# EAGLE board SSU-rev5 (EAGLE 7.2.0)
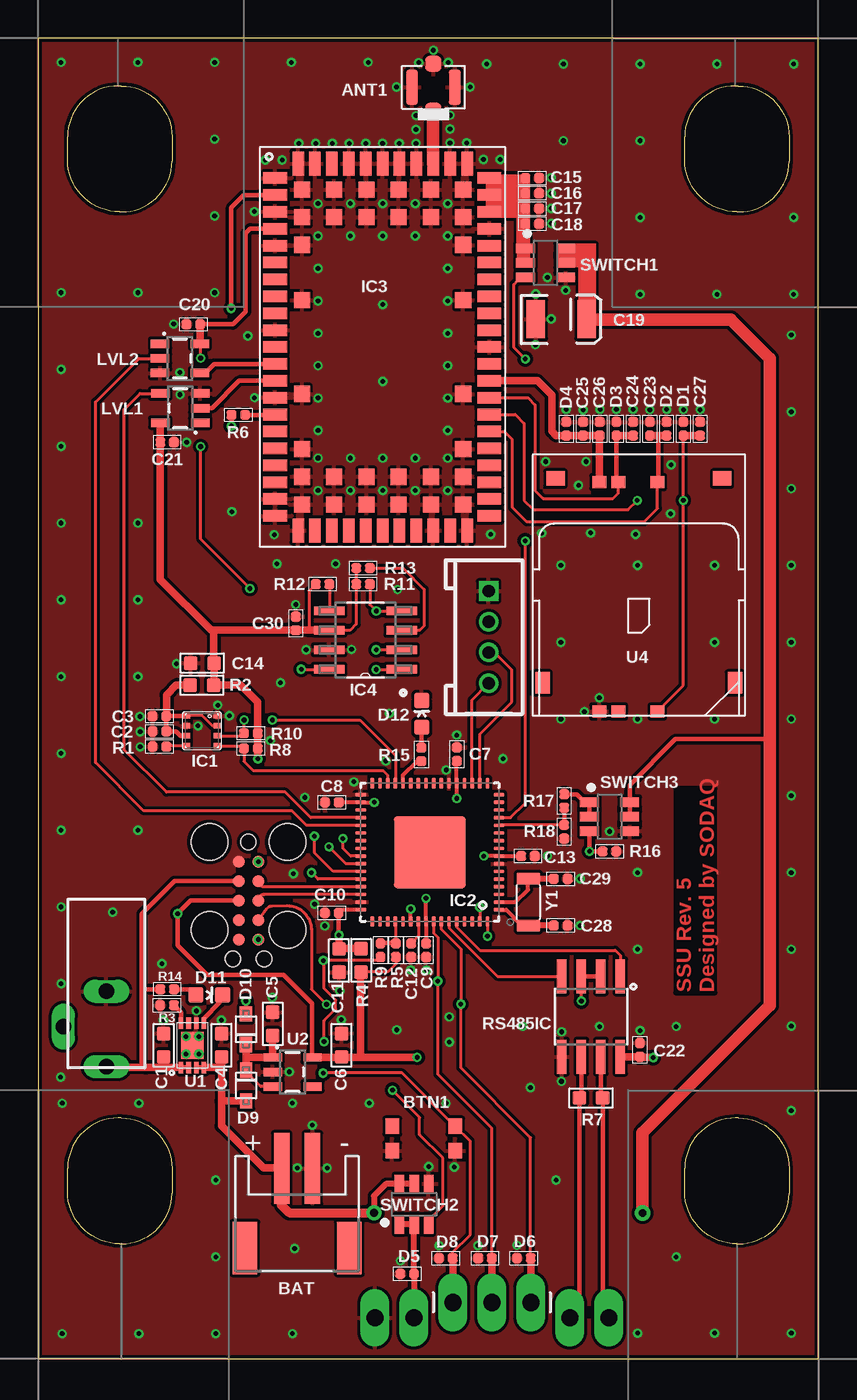
[diagram p0: board, top side]
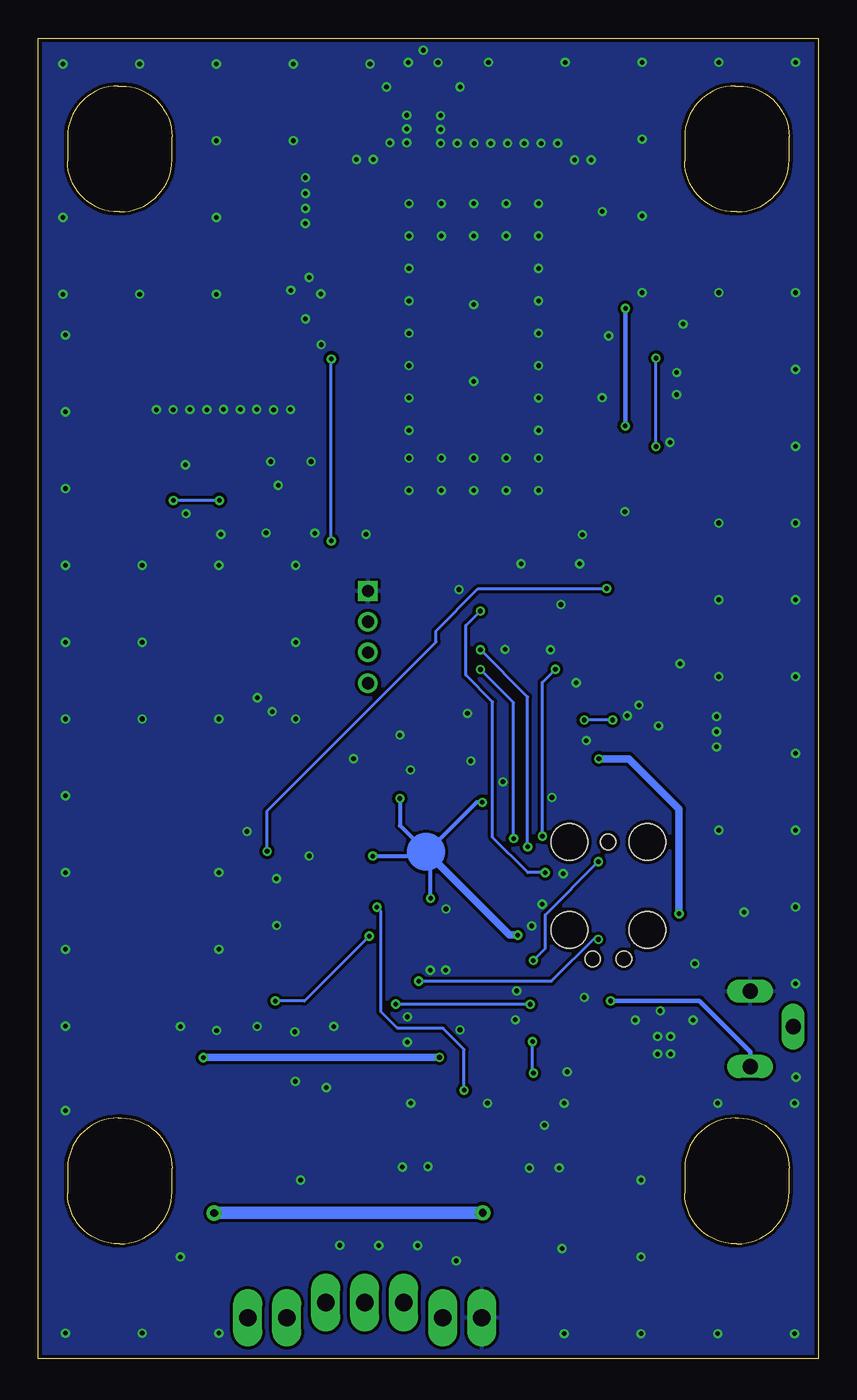
[diagram p1: board, bottom side, seen from below]

Size 50.8 x 86 mm. Coordinates in mm from the lower left corner, seen from the top.
Outline: 0,0 50.8,0 50.8,86 0,86 0,0
Outline: 42.1,78.1 42.1,79.6 arc-90 45.4,82.9 45.6,82.9 arc-90 48.9,79.6 48.9,78 arc-90 45.6,74.7 45.5,74.7 arc-90 42.1,78.1
Outline: 1.9,78.1 1.9,79.6 arc-90 5.2,82.9 5.4,82.9 arc-90 8.7,79.6 8.7,78 arc-90 5.4,74.7 5.3,74.7 arc-90 1.9,78.1
Outline: 1.9,10.9 1.9,12.4 arc-90 5.2,15.7 5.4,15.7 arc-90 8.7,12.4 8.7,10.8 arc-90 5.4,7.5 5.3,7.5 arc-90 1.9,10.9
Outline: 42.1,10.9 42.1,12.4 arc-90 45.4,15.7 45.6,15.7 arc-90 48.9,12.4 48.9,10.8 arc-90 45.6,7.5 45.5,7.5 arc-90 42.1,10.9
Copper layers (1*16): Top 0.018mm / dielectric 1.55mm / Bottom 0.018mm
Design rules "eC_2Layer_PClass6_BaseCopperO18_eCDefault *": minimum track width 0.15mm, minimum drill 0.3mm, track to track 0.15mm, track to pad 0.15mm, pad to pad 0.15mm, via to via 0.15mm, smd to smd 0mil, copper to edge 0.25mm, drill to drill 0.35mm, minimum pad ring 0.175mm, minimum via ring 0.125mm, stop-mask expansion 0mil, vias tented up to drill 0.6mm, thermal gap 0.2mm
tRestrict: area 25.1,82.3 to 26.3,83.3; area 24.2,28 to 24.3,28.1; area 35.5,2.8 to 36.1,3.2; area 8.6,20.4 to 9.3,21.3; area 10.8,20.4 to 11.5,21.3; area 24.5,42.4 to 25.5,42.8

## Footprints (pad centres in the part's own frame; a part is rotated, then mirrored left to right if it is on the bottom)
U-FL = smd 1.016 x 1.016: D -1.524,0; GND3 1.524,0 | smd 2.286 x 0.762: GND1 0,1.397; GND2 0,-1.397
JST-PH-2-SMT-RA = smd 1 x 4.6: 1 1,-3.7; 2 -1,-3.7 | smd 1.6 x 3.4: NC1 -3.4,1.5; NC2 3.4,1.5
KMR2BUTTON = smd 0.9 x 1: A1 -2.05,0.8; A2 2.05,0.8; B1 -2.05,-0.8; B2 2.05,-0.8
C0603 = smd 0.889 x 0.889: 1 -0.762,0; 2 0.762,0
C0402 = smd 0.635 x 0.635: 1 -0.445,0; 2 0.445,0
EIA3528 = smd 1.2 x 2.5: A 1.65,0; C -1.65,0
TC2050-IDC = smd 0.787 x 0.787: 1 -2.54,-0.635; 2 -1.27,-0.635; 3 0,-0.635; 4 1.27,-0.635; 5 2.54,-0.635; 6 2.54,0.635; 7 1.27,0.635; 8 0,0.635; 9 -1.27,0.635; 10 -2.54,0.635 | hole 0.991: -3.81,0; 3.81,1.016; 3.81,-1.016 | hole 2.375: -3.81,2.54; -3.81,-2.54; 1.905,2.54; 1.905,-2.54
R0402 = smd 0.635 x 0.635: 1 -0.445,0; 2 0.445,0
SOD-323F = smd 1 x 0.8: A -1,0; C 1,0
LED-0603 = smd 1 x 1: A 0,-0.877; C 0,0.877
BME280 = smd 0.35 x 0.5: 1 0.975,-1.025; 2 0.325,-1.025; 3 -0.325,-1.025; 4 -0.975,-1.025; 5 -0.975,1.025; 6 -0.325,1.025; 7 0.325,1.025; 8 0.975,1.025
QFN64 = smd 4.7 x 4.7: 0 0,0 | smd 0.7 x 0.25: 1 -4.5,3.75; 2 -4.5,3.25; 3 -4.5,2.75; 4 -4.5,2.25; 5 -4.5,1.75; 6 -4.5,1.25; 7 -4.5,0.75; 8 -4.5,0.25; 9 -4.5,-0.25; 10 -4.5,-0.75; 11 -4.5,-1.25; 12 -4.5,-1.75; 13 -4.5,-2.25; 14 -4.5,-2.75; 15 -4.5,-3.25; 16 -4.5,-3.75; 33 4.5,-3.75; 34 4.5,-3.25; 35 4.5,-2.75; 36 4.5,-2.25; 37 4.5,-1.75; 38 4.5,-1.25; 39 4.5,-0.75; 40 4.5,-0.25; 41 4.5,0.25; 42 4.5,0.75; 43 4.5,1.25; 44 4.5,1.75; 45 4.5,2.25; 46 4.5,2.75; 47 4.5,3.25; 48 4.5,3.75 | smd 0.25 x 0.7: 17 -3.75,-4.5; 18 -3.25,-4.5; 19 -2.75,-4.5; 20 -2.25,-4.5; 21 -1.75,-4.5; 22 -1.25,-4.5; 23 -0.75,-4.5; 24 -0.25,-4.5; 25 0.25,-4.5; 26 0.75,-4.5; 27 1.25,-4.5; 28 1.75,-4.5; 29 2.25,-4.5; 30 2.75,-4.5; 31 3.25,-4.5; 32 3.75,-4.5; 49 3.75,4.5; 50 3.25,4.5; 51 2.75,4.5; 52 2.25,4.5; 53 1.75,4.5; 54 1.25,4.5; 55 0.75,4.5; 56 0.25,4.5; 57 -0.25,4.5; 58 -0.75,4.5; 59 -1.25,4.5; 60 -1.75,4.5; 61 -2.25,4.5; 62 -2.75,4.5; 63 -3.25,4.5; 64 -3.75,4.5
SARA-U2 = smd 0.75 x 1.55: 1 2,1; 2 3.1,1; 3 4.2,1; 4 5.3,1; 5 6.4,1; 6 7.5,1; 7 8.6,1; 8 9.7,1; 9 10.8,1; 10 11.9,1; 11 13,1; 12 14.1,1; 13 15.2,1; 14 16.3,1; 15 17.4,1; 16 18.5,1; 17 19.6,1; 18 20.7,1; 19 21.8,1; 20 22.9,1; 21 24,1; 33 24,14.95; 34 22.9,14.95; 35 21.8,14.95; 36 20.7,14.95; 37 19.6,14.95; 38 18.5,14.95; 39 17.4,14.95; 40 16.3,14.95; 41 15.2,14.95; 42 14.1,14.95; 43 13,14.95; 44 11.9,14.95; 45 10.8,14.95; 46 9.7,14.95; 47 8.6,14.95; 48 7.5,14.95; 49 6.4,14.95; 50 5.3,14.95; 51 4.2,14.95; 52 3.1,14.95; 53 2,14.95 | smd 1.55 x 0.75: 22 24.95,2.5; 23 24.95,3.6; 24 24.95,4.7; 25 24.95,5.8; 26 24.95,6.9; 27 24.95,8; 28 24.95,9.1; 29 24.95,10.2; 30 24.95,11.3; 31 24.95,12.4; 32 24.95,13.5; 54 1.05,13.5; 55 1.05,12.4; 56 1.05,11.3; 57 1.05,10.2; 58 1.05,9.1; 59 1.05,8; 60 1.05,6.9; 61 1.05,5.8; 62 1.05,4.7; 63 1.05,3.6; 64 1.05,2.5 | smd 1.05 x 1.05: 65 2.75,2.75; 66 2.75,4.85; 67 2.75,6.95; 68 2.75,9.05; 69 2.75,11.15; 70 2.75,13.25; 71 4.55,2.75; 72 4.55,4.85; 73 4.55,6.95; 74 4.55,9.05; 75 4.55,11.15; 76 4.55,13.25; 77 6.35,2.75; 78 6.35,13.25; 79 9.95,2.75; 80 9.95,13.25; 81 16.05,2.75; 82 16.05,13.25; 83 19.65,2.75; 84 19.65,13.25; 85 21.45,2.75; 86 21.45,4.85; 87 21.45,6.95; 88 21.45,9.05; 89 21.45,11.15; 90 21.45,13.25; 91 23.25,2.75; 92 23.25,4.85; 93 23.25,6.95; 94 23.25,9.05; 95 23.25,11.15; 96 23.25,13.25
SOIC127P600X175-8N = smd 1.981 x 0.559: 1 -2.362,1.905; 2 -2.362,0.635; 3 -2.362,-0.635; 4 -2.362,-1.905; 5 2.362,-1.905; 6 2.362,-0.635; 7 2.362,0.635; 8 2.362,1.905
HW4-2.0 = drill 0.8 pad 1.27 square: 1 -3,0 | drill 0.8 pad 1.27: 2 -1,0; 3 1,0; 4 3,0
SSU-POWER-JACK = drill 1 long: P$1 -0.1,0; P$2 -5,0; P$3 -2.7,-2.8
SOT23-5 = smd 0.55 x 1.2: 1 -0.95,-1.3; 2 0,-1.3; 3 0.95,-1.3; 4 0.95,1.3; 5 -0.95,1.3
1X02_LONGPADS = drill 1.118 pad 1.88 long: 1 0,0; 2 2.54,0
R0603 = smd 0.889 x 0.889: 1 -0.762,0; 2 0.762,0
SO08 = smd 0.61 x 2.21: 1 -1.905,-2.616; 2 -0.635,-2.616; 3 0.635,-2.616; 4 1.905,-2.616; 5 1.905,2.616; 6 0.635,2.616; 7 -0.635,2.616; 8 -1.905,2.616
1X03_LONGPADS = drill 1.118 pad 1.88 long: 1 0,0; 2 2.54,0; 3 5.08,0
TSOT23-6 = smd 0.62 x 1.22: P$1 -0.95,-1.31; P$2 0,-1.31; P$3 0.95,-1.31; P$4 0.95,1.31; P$5 0,1.31; P$6 -0.95,1.31
DFN8-2X3MM = smd 0.3 x 0.75: 1 -0.75,-1.45; 2 -0.25,-1.45; 3 0.25,-1.45; 4 0.75,-1.45; 5 0.75,1.45; 6 0.25,1.45; 7 -0.25,1.45; 8 -0.75,1.45 | smd 1.45 x 1.75: C_PAD 0,0
MICRO_SIM_78800-0001 = smd 0.8 x 0.9: C1 -6.71,-2.575; C2 -6.71,-1.333; C3 -6.71,1.205; C5 8.23,-2.575; C6 8.23,-1.333; C7 8.23,1.205 | smd 0.95 x 1.2: NC@0 -6.94,5.425; NC@1 -6.94,-5.425 | smd 1.4 x 0.95: NC@2 6.37,6.265; NC@3 6.37,-6.265
X2-SMD-3.2X1.5X0.55MM = smd 0.762 x 1.524: 1 -1.524,0; 2 1.524,0

## Placement (x,y rotation side)
ANT1  UFL  [U-FL]  25.73,82.82 90 top
BAT  [JST-PH-2-SMT-RA]  16.85,8.72 180 top
BTN1  KMR2BUTTON  [KMR2BUTTON]  25.1,14.36 0 top
C1  10uF  [C0603]  8.16,20.43 90 top
C2  100nF  [C0402]  7.89,40.87 180 top
C3  100nF  [C0402]  7.88,41.86 180 top
C4  10uF  [C0603]  11.93,20.43 90 top
C5  10uF  [C0603]  15.26,21.82 90 top
C6  10uF  [C0603]  19.74,20.43 90 top
C7  100nF  [C0402]  27.26,39.38 90 top
C8  100nF  [C0402]  19.12,36.25 180 top
C9  100nF  [C0402]  25.26,26.62 270 top
C10  100nF  [C0402]  19.11,29.05 180 top
C11  10uF  [C0603]  19.58,25.95 270 top
C12  1uF  [C0402]  24.28,26.62 90 top
C13  100nF  [C0402]  31.89,32.75 0 top
C14  10uF  [C0603]  10.68,45.31 180 top
C15  15pF  [C0402]  32.17,76.9 0 top
C16  56pF  [C0402]  32.17,75.91 0 top
C17  10nF  [C0402]  32.17,74.92 0 top
C18  100nF  [C0402]  32.17,73.93 0 top
C19  220uF  [EIA3528]  34.05,67.72 0 top
C20  100nF  [C0402]  10.09,67.38 180 top
C21  100nF  [C0402]  8.39,59.7 0 top
C22  100nF  [C0402]  39.18,20.13 270 top
C23  56pF  [C0402]  39.83,60.58 90 top
C24  56pF  [C0402]  38.74,60.58 90 top
C25  56pF  [C0402]  35.48,60.58 90 top
C26  100nF  [C0402]  36.57,60.58 90 top
C27  56pF  [C0402]  43.1,60.58 90 top
C28  15pF  [C0402]  34.02,28.23 180 top
C29  15pF  [C0402]  34.02,31.27 180 top
C30  100nF  [C0402]  16.77,47.9 90 top
CONN1  TC-10PIN  [TC2050-IDC]  13.68,29.86 270 top
D1  ESD_DIODE  [R0402]  42.01,60.58 90 top
D2  ESD_DIODE  [R0402]  40.92,60.58 90 top
D3  ESD_DIODE  [R0402]  37.65,60.58 90 top
D4  ESD_DIODE  [R0402]  34.39,60.58 90 top
D5  ESD_DIODE  [R0402]  24.02,5.55 180 top
D6  ESD_DIODE  [R0402]  31.62,6.56 180 top
D7  ESD_DIODE  [R0402]  29.09,6.56 180 top
D8  ESD_DIODE  [R0402]  26.54,6.56 180 top
D9  [SOD-323F]  13.53,17.81 90 top
D10  [SOD-323F]  13.52,21.47 270 top
D11  Yellow  [LED-0603]  11.13,23.71 270 top
D12  Yellow  [LED-0603]  24.97,42.01 0 top
IC1  BME280  [BME280]  10.65,40.91 90 top
IC2  ATSAMD21J18-MU  [QFN64]  25.5,33 180 top
IC3  UBLOX_SARA_U2STANDARD  [SARA-U2]  14.42,78.9 270 top
IC4  AT45DB161E  [SOIC127P600X175-8N]  21.3,46.82 180 top
J1  4P-2.0  [HW4-2.0]  29.33,47.01 270 top
JACK1  SSU-POWER-JACK  [SSU-POWER-JACK]  4.43,18.95 270 top
LVL1  SN74LV1T34DBVR  [SOT23-5]  9.24,61.92 90 top
LVL2  SN74LV1T34DBVR  [SOT23-5]  9.22,65.16 270 top
PWR  [1X02_LONGPADS]  21.92,2.68 0 top
R1  0R  [R0402]  7.89,39.88 180 top
R2  FERRITE  [R0603]  10.65,43.88 0 top
R3  2K  [R0402]  8.38,23.03 0 top
R4  FERRITE  [R0603]  21.02,25.96 270 top
R5  10K  [R0402]  23.29,26.62 270 top
R6  100K  [R0402]  13.02,61.48 180 top
R7  120R  [R0603]  36,17 0 top
R8  3K  [R0402]  13.84,39.76 180 top
R9  300R  [R0402]  22.29,26.62 270 top
R10  3K  [R0402]  13.84,40.75 180 top
R11  100K  [R0402]  21.15,50.46 180 top
R12  100K  [R0402]  18.51,50.46 180 top
R13  100K  [R0402]  21.15,51.51 180 top
R14  300R  [R0402]  8.39,24.08 180 top
R15  300R  [R0402]  24.95,39.37 270 top
R16  10K  [R0402]  37.2,33.05 180 top
R17  3K  [R0402]  34.25,36.34 90 top
R18  10K  [R0402]  34.25,34.33 90 top
RS485  [1X02_LONGPADS]  34.62,2.68 0 top
RS485IC  SP3485  [SO08]  36,22.3 180 top
SWD  [1X03_LONGPADS]  27,3.68 0 top
SWITCH1  SIP32510  [TSOT23-6]  33.04,71.38 270 top
SWITCH2  SIP32510  [TSOT23-6]  24.47,10.09 0 top
SWITCH3  SIP32510  [TSOT23-6]  37.21,35.32 270 top
U1  MCP73831  [DFN8-2X3MM]  10.04,20.43 0 top
U2  XC6220  [SOT23-5]  16.56,18.69 270 top
U4  MICRO_SIM_6P_MOLEX  [MICRO_SIM_78800-0001]  39.11,50.4 270 top
Y1  32.768KHZ  [X2-SMD-3.2X1.5X0.55MM]  31.91,29.75 270 top

## Library data of the parts
ANT1 = Connector
BAT D9 D10 = adafruit
BTN1 IC4 JACK1 LVL1 LVL2 SWITCH1-SWITCH3 = m2m4all
C1-C18 C20-C30 D1-D8 IC2 R1 R3 R5-R18 U1 U4 = gknff
C19 = SparkFun-Capacitors; FARNELL: 2479900
CONN1 = TagConnect
D11 D12 = SparkFun-LED; PROD_ID: DIO-09003
IC1 = bosch-bme280
IC3 = ublox
J1 = Seeed-OPL-Connector
PWR RS485 SWD = SparkFun-Connectors
R2 R4 = gknff; FARNELL: 1515723
RS485IC = SparkFun-DigitalIC
U2 = SparkFun-PowerIC; FARNELL: 1830935
Y1 = Seeed-OPL-crystal-osctllator; MPN: FC-135

## Nets
1.8V: C20.1 IC3.4 LVL2.5 R16.2 SWITCH3.P$3
2G_ENABLE: IC2.13 SWITCH1.P$3
3.3V: C6.1 C14.1 C21.1 C22.2 C30.1 CONN1.3 IC4.6 LVL1.5 R2.2 R4.2 R5.2 R8.1 R10.1 R11.2 R12.2 R13.2 RS485IC.8 U2.5
A: R7.1 RS485.1 RS485IC.6
B: R7.2 RS485.2 RS485IC.7
EPAD: IC2.0
FLASH_CS: IC2.44 IC4.4 R11.1
FLASH_RESET: IC4.3 R13.1
GND: ANT1.GND1 ANT1.GND2 ANT1.GND3 BAT.2 BTN1.B1 BTN1.B2 C1.2 C2.2 C3.2 C4.2 C5.2 C6.2 C7.2 C8.2 C9.2 C10.2 C11.2 C12.1 C13.2 C14.2 C15.2 C16.2 C17.2 C18.2 C19.C C20.2 C21.2 C22.1 C23.2 C24.2 C25.2 C26.2 C27.2 C28.1 C29.1 C30.2 CONN1.1 D1.2 D2.2 D3.2 D4.2 D5.2 D6.2 D7.2 D8.2 D12.C IC1.1 IC1.7 IC2.7 IC2.22 IC2.33 IC2.47 IC2.54 IC3.1 IC3.3 IC3.5 IC3.10 IC3.14 IC3.20 IC3.21 IC3.22 IC3.30 IC3.32 IC3.43 IC3.50 IC3.54 IC3.55 IC3.57 IC3.58 IC3.59 IC3.60 IC3.61 IC3.63 IC3.64 IC3.65 IC3.66 IC3.67 IC3.68 IC3.69 IC3.70 IC3.71 IC3.72 IC3.73 IC3.74 IC3.75 IC3.76 IC3.77 IC3.78 IC3.79 IC3.80 IC3.81 IC3.82 IC3.83 IC3.84 IC3.85 IC3.86 IC3.87 IC3.88 IC3.89 IC3.90 IC3.91 IC3.92 IC3.93 IC3.94 IC3.95 IC3.96 IC4.7 J1.1 JACK1.P$2 LVL1.3 LVL2.3 PWR.1 R1.2 R3.1 R16.1 R18.1 RS485IC.5 SWITCH1.P$4 SWITCH2.P$4 SWITCH3.P$4 U1.6 U1.C_PAD U2.2 U4.C5
MCU_RESET: BTN1.A2 CONN1.10 D8.1 R9.2 SWD.1
MISO: IC2.43 IC4.8
MOSI: IC2.41 IC4.1
N$1: C12.2 IC2.55
N$2: IC2.52 R5.1 R9.1
N$3: C28.2 IC2.1 Y1.2
N$4: IC1.5 R1.1
N$5: C7.1 C8.1 C9.1 C10.1 C11.1 C13.1 IC2.8 IC2.21 IC2.34 IC2.48 IC2.56 R4.1
N$6: R3.2 U1.8
N$7: C29.2 IC2.2 Y1.1
N$8: IC2.18 J1.3
N$9: ANT1.D IC3.56
N$10: IC3.2 R6.2
N$11: IC3.15 R6.1
N$12: C2.1 C3.1 IC1.2 IC1.6 IC1.8 R2.1
N$13: C15.1 C16.1 C17.1 C18.1 IC3.51 IC3.52 IC3.53 SWITCH1.P$1 SWITCH1.P$2
N$14: IC2.19 J1.4
N$15: D5.1 PWR.2 SWITCH2.P$1 SWITCH2.P$2
N$16: C5.1 D9.C D10.C U2.1 U2.3
N$17: D11.C U1.5
N$18: D11.A R14.1
N$19: J1.2
N$20: IC2.28 R15.2
N$21: D12.A R15.1
N$23: R17.2 SWITCH3.P$1 SWITCH3.P$2
RS485_DATA_IN: IC2.59 RS485IC.4
RS485_DATA_OUT: IC2.60 RS485IC.1
RS485_DIRECTION: IC2.64 RS485IC.2 RS485IC.3
SARA_RX_1.8: IC3.12 LVL2.4
SARA_RX_3.3: IC2.37 LVL2.2
SARA_TX_1.8: IC3.13 LVL1.2
SARA_TX_3.3: IC2.36 LVL1.4
SCL: IC1.4 IC2.30 R8.2
SDA: IC1.3 IC2.29 R10.2
SIM_CLK: C23.1 D2.1 IC3.38 U4.C3
SIM_IO: C27.1 D1.1 IC3.39 U4.C7
SIM_RST: C24.1 D3.1 IC3.40 U4.C2
SIM_VCC: C25.1 C26.1 D4.1 IC3.41 U4.C1
SPICLK: IC2.42 IC4.2
SWCLK: CONN1.6 D7.1 IC2.57 SWD.2
SWDIO: CONN1.7 D6.1 IC2.58 SWD.3
UBLOX_SENSE: IC2.12 R17.1 R18.2
USBN: CONN1.9 IC2.45
USBP: CONN1.8 IC2.46
V_BATT: BAT.1 C4.1 C19.A D9.A SWITCH1.P$5 SWITCH1.P$6 SWITCH2.P$5 SWITCH2.P$6 SWITCH3.P$5 SWITCH3.P$6 U1.3 U1.4
VIN: C1.1 CONN1.2 D10.A JACK1.P$1 R14.2 U1.1 U1.2
WAP_ENABLE: IC2.63 SWITCH2.P$3
WP: IC4.5 R12.1

## Tracks (layer width: path | path; a pad name or v marks a point on that pad's centre or on a via)
1.8V  (via drill 0.3)
  Top 0.2: v13.78,50.17 10.57,53.38 v10.57,59.42 | v10.57,65.18 10.57,66.11 LVL2.5 | R16.2
  Top 0.3: IC3.4 15.4,73.62 13.8,73.62 13.5,73.32 13.5,68.2 12.68,67.38 C20.1 | SWITCH3.P$3 v35.9,33.06 R16.2
  Top 0.5: C20.1 10.53,66.12 LVL2.5
  Bottom 0.2: v35.9,33.06 35.9,35.69 24.9,46.69 24.9,47.42 22.15,50.17 v13.78,50.17 | v10.57,59.42 v10.57,65.18
2G_ENABLE  (via drill 0.3)
  Top 0.2: IC2.13 30.76,35.25 31.72,36.21 v31.72,53.27 | v31.72,65.12 30.97,65.87 30.97,69.97 31.25,70.25 31.55,70.25 SWITCH1.P$3
  Bottom 0.2: v31.72,53.27 v31.72,65.12
3.3V  (via drill 0.3)
  Top 0.2: R5.2 23.29,25.73 22.77,25.21 21.03,25.21 R4.2 | R12.2 17.62,50.01 17.62,47.45 | IC4.6 20.3,47.45 20.71,47.85 R11.2 R13.2
  Top 0.3: U2.5 17.84,19.66 17.84,23.15 15.97,25.02 10.99,25.02 9.07,26.94 v9.07,29 9.93,29.86 CONN1.3
  Top 0.5: LVL1.5 C21.1 | C21.1 | R8.1 R10.1 14.29,42.79 13.18,43.9 11.43,43.9 R2.2 11.44,43.91 C14.1 11.43,45.32 11.43,47.28 11.26,47.45 | C21.1 7.94,50.77 11.26,47.45 | 19.71,19.64 arc90 C6.1 19.71,19.64 | R8.1 | v14.29,39.08 v14.28,39.09 R8.1 | U2.5 19.71,19.64 | IC4.6 17.62,47.45 C30.1 | C30.1 | C30.1 11.26,47.45 | 19.71,19.64 20.99,19.64 | 20.99,19.64 v24.67,19.64 | RS485IC.8 C22.2 39.24,19.63 v40.05,19.63 | R4.2 20.99,25.17 20.99,19.64
  Bottom 0.5: v9.07,29 9.07,35.81 12.34,39.08 v14.29,39.08 | v24.67,19.64 v40.04,19.64 v40.05,19.63
A
  Top 0.3: RS485IC.6 35.37,17.13 R7.1 35.24,3.3 RS485.1
B
  Top 0.3: RS485IC.7 36.63,17.13 R7.2 36.76,3.08 RS485.2
FLASH_CS  (via drill 0.3)
  Top 0.2: IC2.44 18.21,31.25 v17.79,31.67 | IC4.4 23.65,48.71 v22.01,48.71 21.59,49.13 R11.1
  Bottom 0.2: v17.79,31.67 18.92,31.67 21.22,33.97 21.22,42.8 22.95,44.53 22.95,47.77 v22.01,48.71
FLASH_RESET
  Top 0.2: R13.1 23.74,51.51 25.13,50.12 25.13,47.74 24.84,47.45 24.27,47.45 24.25,47.43 23.69,47.43 IC4.3
GND  (via drill 0.3)
  Top 0.25: IC2.54 v24.25,29.31
  Bottom 0.25: v24.25,29.31 24.25,29.36 24.14,29.47
  other vias: 16.69,7.19 14.07,74.72 31.17,7.4 28.63,7.39 26.1,7.38 23.58,6.39 10.4,41.23 11.68,42.58 6.63,40.85 6.62,41.84 12.44,41.89 29.46,53.71 15.36,53.68 14.08,62.6 1.48,84.44 6.48,84.44 11.48,84.44 16.48,84.44 21.48,84.44 49.2,84.34 44.2,84.34 39.2,84.34 34.2,84.34 29.2,84.34 39.2,79.34 34.2,79.34 11.48,79.44 24.6,79.17 33.41,73.95 39.2,74.34 11.48,74.44 1.48,69.44 6.48,69.44 11.48,69.44 39.2,69.34 44.2,69.34 49.2,69.34 34.35,69.6 1.48,64.44 1.48,59.44 1.48,54.44 1.48,49.44 1.48,44.44 1.48,39.44 1.48,34.44 1.48,29.44 1.48,24.44 1.55,1.65 1.45,18.35 1.55,16.65 11.55,1.65 6.55,1.65 16.55,1.65 49.04,1.68 44.04,1.68 39.04,1.68 49.04,16.18 49.04,21.68 49.04,26.68 49.04,31.68 49.04,36.68 49.04,41.68 49.04,46.68 49.04,51.68 49.04,56.68 49.04,61.68 49.04,66.68 26.81,79.2 23.51,79.17 22.42,79.17 21.33,79.17 20.24,79.17 19.15,79.17 18.06,79.17 16.97,79.17 27.9,79.2 28.99,78.11 30.08,78.11 15.88,78.08 14.79,78.08 24.6,80.07 24.6,80.97 26.81,80.1 26.81,81 25.73,85.23 24.77,84.42 26.7,84.43 23.33,82.83 28.12,82.83 18.22,75.24 18.22,56.56 18.22,58.67 20.33,58.67 20.33,56.56 22.44,56.56 24.55,56.56 26.66,56.56 26.66,58.67 24.55,58.67 22.44,58.67 20.33,75.24 22.44,75.24 24.55,75.24 26.66,75.24 26.66,73.13 24.55,73.13 22.44,73.13 20.33,73.13 18.22,73.13 18.22,71.02 26.66,71.02 18.22,60.47 26.66,60.47 18.22,66.8 18.22,64.69 26.66,66.8 26.66,64.69 18.22,68.91 26.66,68.91 26.66,62.58 18.22,62.58 9.22,64.24 9.23,62.8 9.66,59.7 8.81,67.4 33.4,76.93 33.4,75.91 33.4,74.92 33.16,70.44 32.4,69.36 32.38,66.06 33.4,67.73 16.87,12.44 18.81,12.43 11.92,22.06 8.15,22.06 9.62,21 16.35,18.7 19.73,22.09 17.99,29.62 18.66,28.2 26.56,38.36 24.26,25.33 25.28,25.32 19.64,23.97 20.54,37.58 33.16,32.76 17.35,36.57 27.25,40.63 10.46,21 10.46,19.86 9.62,19.86 9,45.28 6.63,39.86 34.38,61.83 32.79,53.78 35.97,53.79 38.91,53.7 41.18,55.05 35.48,61.81 36.58,61.84 37.65,61.83 38.74,61.84 39.83,61.82 40.93,61.83 42.02,61.82 43.11,61.82 35.18,56.89 35.67,58.44 33.04,58.44 41.22,58.23 35.57,42.16 36.54,43.06 15.11,40.27 22.63,38.94 16.61,31.61 17.44,46.18 20.4,46.21 16.76,49.13 34.09,21.3 34.07,18.08 39.19,21.39 35.28,28.23 35.29,31.28 17.84,15.22 13.65,66.62 23.4,50.11 25.43,12.53 10.29,22.67 15.24,23.55 37.21,34.35 11.55,6.65 11.55,11.65 6.55,16.65 16.55,16.65 21.55,16.65 26.55,16.65 41.55,6.65 41.55,21.65 36.55,21.65 31.55,21.65 26.76,22.28 23.34,21.43 39.04,26.68 39.04,31.68 39.04,41.68 44.04,41.68 34.04,41.68 34.04,46.68 34.04,51.68 44.04,51.68 44.04,46.68 39.04,51.68 6.48,54.44 6.48,49.44 6.48,44.44 49.2,74.34 22.44,63.67 22.44,68.67 6.48,34.44 4.84,29.09 15.77,44.04 22.85,42.04 8.04,25.74 30.27,39.09 19.36,51.79 15.54,51.79 12.6,55.18 26.77,20.63 27.09,12.5 32.05,17.67 33.72,11.65
  pour Top (isolate 0.2): -1,-1 -1,87 52,87 52,-1
  pour Bottom (isolate 0.2): -2,-2 -2,88 53,88 53,-2
MCU_RESET  (via drill 0.3)
  Top 0.2: R9.2 22.06,25.95 v18.56,25.95 18.61,25.9 18.61,24.13 19.36,23.38 19.36,22.79 18.61,22.04 v18.61,20.67 | v14.32,32.39 14.37,32.39 CONN1.10 | v18.55,18.62 23.69,18.62 BTN1.A2 28.13,14.18 28.13,8.1 26.98,6.96 D8.1
  Top 0.5: SWD.1 27,6.54 D8.1
  Bottom 0.2: v18.56,25.95 17.78,26.73 17.78,28.93 v14.32,32.39 | v18.55,18.62 18.61,18.68 v18.61,20.67
MISO  (via drill 0.3)
  Top 0.2: IC2.43 19.21,31.75 17.99,32.97 17.99,34.02 v17.97,34.04 | v17.12,44.91 IC4.8
  Bottom 0.2: v17.97,34.04 17.97,44.06 v17.12,44.91
MOSI  (via drill 0.3)
  Top 0.2: 24.25,44.91 IC4.1 23.65,44.9 v22,44.9 | IC2.41 20.34,32.75 19.85,33.24 v19.85,33.88 v19.84,33.89
  Bottom 0.2: v19.84,33.89 19.84,42.74 v22,44.9
N$1
  Top 0.2: IC2.55 24.75,27.54 C12.2
N$2
  Top 0.2: IC2.52 23.25,27.11
  Top 0.25: 23.25,27.11 R5.1 | 22.33,27.11 R9.1
  Top 0.3: 23.25,27.11 22.33,27.11
N$3
  Top 0.2: Y1.2
  Top 0.25: IC2.1 30.48,29.25 31.35,28.38 31.76,28.38 Y1.2
  Top 0.4: C28.2 Y1.2
N$4
  Top 0.2: IC1.5 8.39,39.94 R1.1
N$5  (via drill 0.3)
  Top 0.25: C8.1 IC2.34 v21.88,36.25 | C7.1 27.25,38.92 IC2.21 v27.25,36.5 | v25.25,30 IC2.56 25.25,27.07 C9.1 | 19.55,27.62 v19.58,27.6 | IC2.48 19.75,29.25 C10.1 | v29.02,32.75 IC2.8 C13.1
  Top 0.3: C10.1 19.55,27.62
  Top 0.5: v19.58,27.6 C11.1 19.59,26.72 R4.1
  Bottom 0.25: v21.88,36.25 22.26,36.25 25.51,33 25.53,33.02 | v27.25,36.5 27.25,34.74 25.53,33.02 | v25.25,30 25.25,32.49 25,32.49 | v29.02,32.75 25.8,32.75 25.53,33.02
  Bottom 0.5: v19.58,27.6 20.11,27.6 25,32.49 25.51,33
N$6
  Top 0.3: U1.8 9.29,22.56 R3.2
N$7
  Top 0.2: Y1.1
  Top 0.25: IC2.2 31.08,29.75 31.89,30.56 31.89,31.25 Y1.1
  Top 0.4: C29.2 Y1.1
N$8
  Top 0.2: IC2.18 28.75,40.7 30.84,42.79 30.84,44.88 29.85,45.87 29.47,45.87 J1.3
N$9
  Top 0.8: IC3.56 ANT1.D
N$10  (via drill 0.3)
  Top 0.3: R6.2 v12.57,60.77 v12.57,60.76 | v12.56,68.42 12.56,74.98 13.37,75.79 IC3.2
  Bottom 0.3: v12.57,60.76 12.57,67.41 v12.56,68.42
N$11
  Top 0.3: R6.1 15.4,61.48 IC3.15
N$12
  Top 0.2: IC1.2 11.34,41.23 10.68,41.89 IC1.8
  Top 0.3: IC1.8 8.32,41.88 C3.1 8.34,41.85 C2.1 8.35,40.86 8.98,40.86 9.26,40.59 IC1.6
  Top 0.5: R2.1 8.98,43.88 8.34,43.24 8.34,41.88 C3.1
N$13
  Top 0.5: SWITCH1.P$2 SWITCH1.P$1 C18.1 C17.1 C16.1 C15.1 IC3.53 IC3.52 IC3.51
N$14
  Top 0.2: IC2.19 28.25,42.93 J1.4
N$15
  Top 0.4: PWR.2 D5.1 SWITCH2.P$2 SWITCH2.P$1
N$16
  Top 0.2: U2.3 14.49,17.74 13.88,18.35 D9.C
  Top 0.5: D9.C 13.53,19.5 | 13.53,19.5 D10.C | 13.53,19.5 13.67,19.64 U2.1 C5.1
N$17
  Top 0.3: U1.5 10.79,22.19 11.81,23.21 11.81,23.51 D11.C
N$18
  Top 0.3: R14.1 9.88,24.08 D11.A
N$20
  Top 0.25: IC2.28 23.75,38.02 24.66,38.92 R15.2
N$21
  Top 0.25: R15.1 24.97,39.83
  Top 0.3: 24.97,39.83 D12.A
N$23
  Top 0.3: SWITCH3.P$2 SWITCH3.P$1 35.57,36.27 35.07,36.77 34.26,36.77 R17.2
RS485_DATA_IN
  Top 0.2: 34.09,25.73 RS485IC.4 29.89,24.92 26.75,28.06 IC2.59
RS485_DATA_OUT
  Top 0.2: IC2.60 27.25,28.13 28.76,26.62 37.58,26.62 37.91,26.29 RS485IC.1
RS485_DIRECTION  (via drill 0.3)
  Top 0.2: IC2.64 v29.25,27.53 | v35.37,23.31 v35.37,23.32 RS485IC.3
  Top 0.3: RS485IC.3 RS485IC.2
  Bottom 0.2: v29.25,27.53 33.47,23.31 v35.37,23.31
SARA_RX_1.8
  Top 0.3: IC3.12 11.44,64.8 10.85,64.21 LVL2.4
SARA_RX_3.3
  Top 0.2: IC2.37 17.46,34.75 16.5,35.71 16.48,35.69 6.87,35.69 3.72,38.84 3.72,62.32 6.56,65.16 LVL2.2
SARA_TX_1.8
  Top 0.3: IC3.13 13.09,63.7 11.32,61.93 LVL1.2
SARA_TX_3.3
  Top 0.2: IC2.36 17.74,35.25 16.08,36.91 8.34,36.91 5.58,39.67 5.58,61.83 6.62,62.87 LVL1.4
SCL
  Top 0.2: IC1.4 13.22,39.94 arc-90 R8.2 13.4,38.91 13.99,38.32 22.46,38.32 22.75,38.03 IC2.30
SDA  (via drill 0.3)
  Top 0.2: IC1.3 13.23,40.59 R10.2 v13.4,41.6 v13.4,41.61 | v15.24,41.61 20.95,41.61 23.25,39.31 IC2.29
  Bottom 0.2: v13.4,41.61 v15.24,41.61
SIM_CLK
  Top 0.2: IC3.38 30.35,60.4 30.86,59.89 30.86,55.47 31.8,54.53 39.46,54.53 40.32,55.39 U4.C3
  Top 0.3: U4.C3 40.39,57.19 40.39,60.14
  Top 0.5: C23.1 40.39,60.14 D2.1
SIM_IO  (via drill 0.3)
  Top 0.2: IC3.39 31.07,61.5 31.64,60.93 31.64,55.91 32.24,55.31 38.41,55.31 v39.01,55.91 | D1.1 v42.01,55.91 42.01,43.87 U4.C7
  Top 0.5: D1.1 C27.1
  Bottom 0.2: v39.01,55.91 v42.01,55.91
SIM_RST
  Top 0.2: IC3.40 31.89,62.6 32.36,62.13 32.36,56.55 32.87,56.04 37.43,56.04 37.77,56.38 U4.C2
  Top 0.3: U4.C2 37.65,57.24 D3.1
  Top 0.5: C24.1 D3.1
SIM_VCC
  Top 0.5: U4.C1 36.53,60.1 C26.1 C25.1 D4.1 33.72,60.14 33.45,60.41 33.45,62.77 32.52,63.7 IC3.41
SPICLK  (via drill 0.3)
  Top 0.2: v22,46.19 IC4.2 | IC2.42 20.03,32.25 v18.93,33.35
  Bottom 0.2: v18.93,33.35 18.93,43.12 v22,46.19
SWCLK  (via drill 0.3)
  Top 0.2: D7.1 29.54,15.03 26.02,18.54 v26.02,24.61 26.02,27.46 25.75,27.73 IC2.57 | v14.32,27.32 14.31,27.55 CONN1.6
  Top 0.5: SWD.2 D7.1
  Bottom 0.2: v26.02,24.61 17.37,24.61 14.48,27.5 v14.32,27.32
SWDIO  (via drill 0.3)
  Top 0.2: IC2.58 26.26,27.97 27.52,26.71 v27.52,23.11 27.52,18.96 32.06,14.41 D6.1 | CONN1.7 arc0 14.88,29.32 arc-50 15.21,29.49 16.19,29.52 arc-90 17.78,27.98 17.78,24.08 v18.77,23.09
  Top 0.5: SWD.3 32.08,6.54 D6.1
  Bottom 0.2: v18.77,23.09 27.52,23.09 v27.52,23.11
UBLOX_SENSE
  Top 0.2: R18.2 30.02,34.77 IC2.12
  Top 0.3: R17.1 R18.2
USBN
  Top 0.2: IC2.45 14.7,30.75 arc-90 CONN1.9
USBP
  Top 0.2: IC2.46 14.71,30.25 arc90 CONN1.8
V_BATT  (via drill 0.5)
  Top 0.2: C19.A 35.39,71.22 35.17,71.44 34.41,71.44 SWITCH1.P$5 | 47.63,40.36 47.65,40.38
  Top 0.3: U1.3 U1.4 | 47.65,34.09 47.65,34.55 | 47.63,40.36 41.5,40.36 38.52,37.38 SWITCH3.P$6 SWITCH3.P$5
  Top 0.4: SWITCH2.P$5 SWITCH2.P$6 22.64,11.39 21.86,10.62 v21.86,9.52
  Top 0.5: SWITCH1.P$5 SWITCH1.P$6 | BAT.1 15.83,12.44 14.67,12.44 11.93,15.18 11.93,16.8 | v21.86,9.51 v21.86,9.52 | C4.1 11.93,19.17 | 11.93,19.17 11.93,16.8 | D9.A 11.94,16.81 11.93,16.8 | U1.4 11.74,18.98 11.93,19.17
  Top 0.6: BAT.1 15.84,10.02 16.34,9.52 v21.86,9.52
  Top 0.8: v39.35,9.5 39.35,14.71 47.65,23.01 47.65,34.55 47.65,40.38 47.65,65.15 45.1,67.7 35.72,67.7 C19.A
  Bottom 0.8: v21.86,9.52 39.33,9.52 v39.35,9.5
VIN  (via drill 0.3)
  Top 0.3: U1.2 U1.1 | C1.1 | 6.73,24.03 6.73,28.99 8.87,31.13 CONN1.2 | 6.73,24.03 6.73,18.98 7,18.98 | D10.A v13.52,23.32 | R14.2 6.78,24.08 6.73,24.03
  Top 0.5: U1.1 8,18.98 | 8,18.98 7,18.98 4.5,18.98 JACK1.P$1 | C1.1 8.16,19.14 8,18.98
  Bottom 0.3: v13.52,23.32 7.74,23.32 4.43,20.01 JACK1.P$1
WAP_ENABLE  (via drill 0.3)
  Top 0.2: SWITCH2.P$3 25.42,9.03 26.35,9.96 26.35,13.09 24.84,14.6 24.84,15.73 v23.07,17.5 | v28.75,29.42 IC2.63
  Bottom 0.2: v23.07,17.5 23.07,20.16 24.44,21.53 27.41,21.53 28.49,22.61 28.49,29.16 v28.75,29.42
WP
  Top 0.2: R12.1 18.95,48.74 IC4.5
(copper drawn outside any net)
  shapes: Bottom circle x1, Top area x8

## Text on the board
Top: SSU Rev. 5 / Designed by SODAQ
tNames: SWITCH1 | SWITCH3 | BTN1 | SWITCH2
tStop: SSU Rev. 5 / Designed by SODAQ